# Altium PCB PCB1.PcbDoc
Units mm, origin at the board's own origin, x right, y up, seen from the top; angles counter-clockwise.
Board outline 20 x 20 mm, 2 copper layers (Top Layer, Bottom Layer); 5 components, 4 nets, 10 pads, 1 vias.
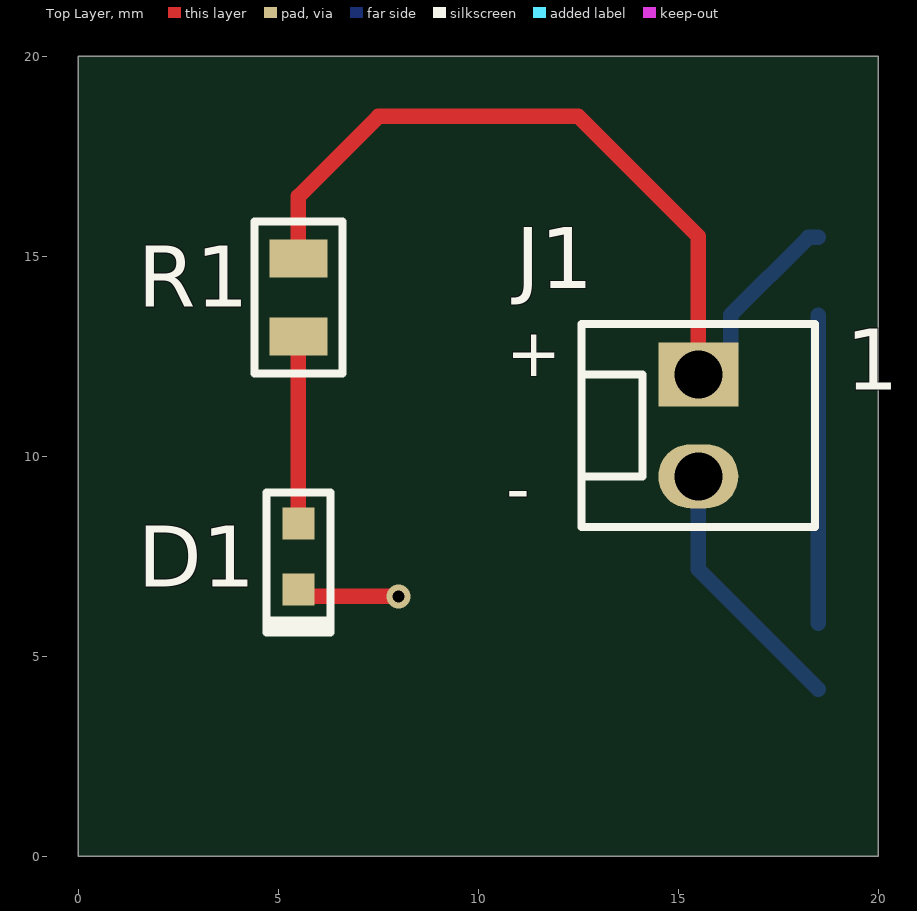
[diagram p0: Top Layer view]
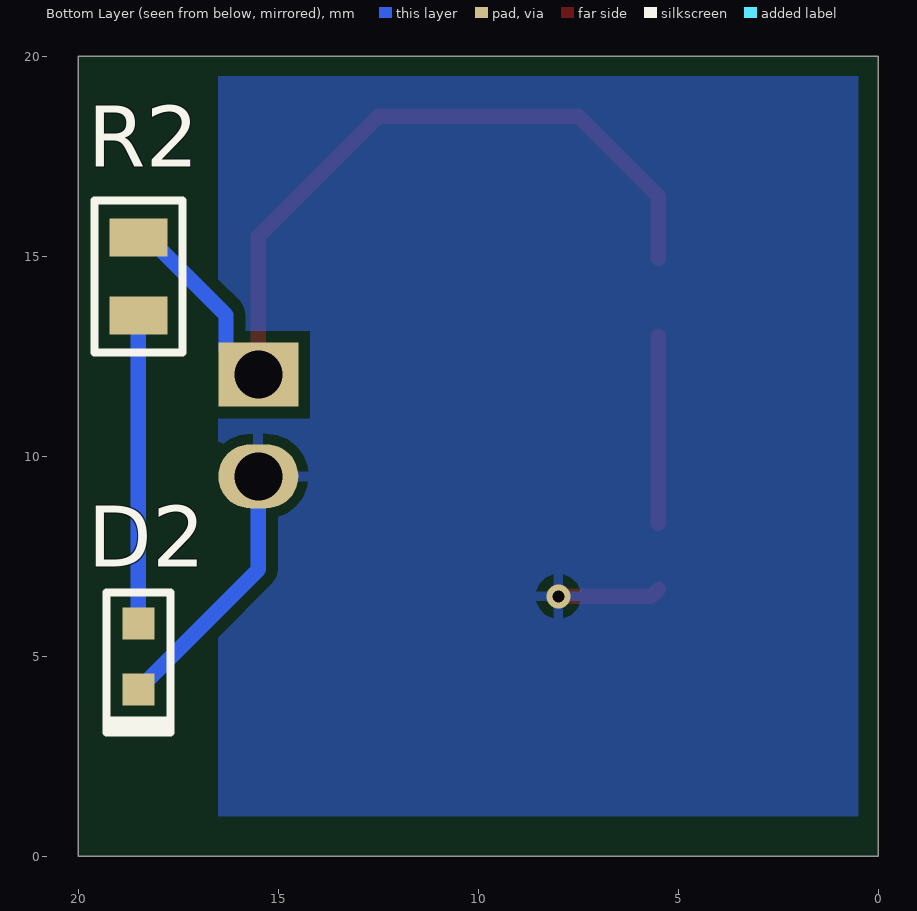
[diagram p1: Bottom Layer view, seen from below]
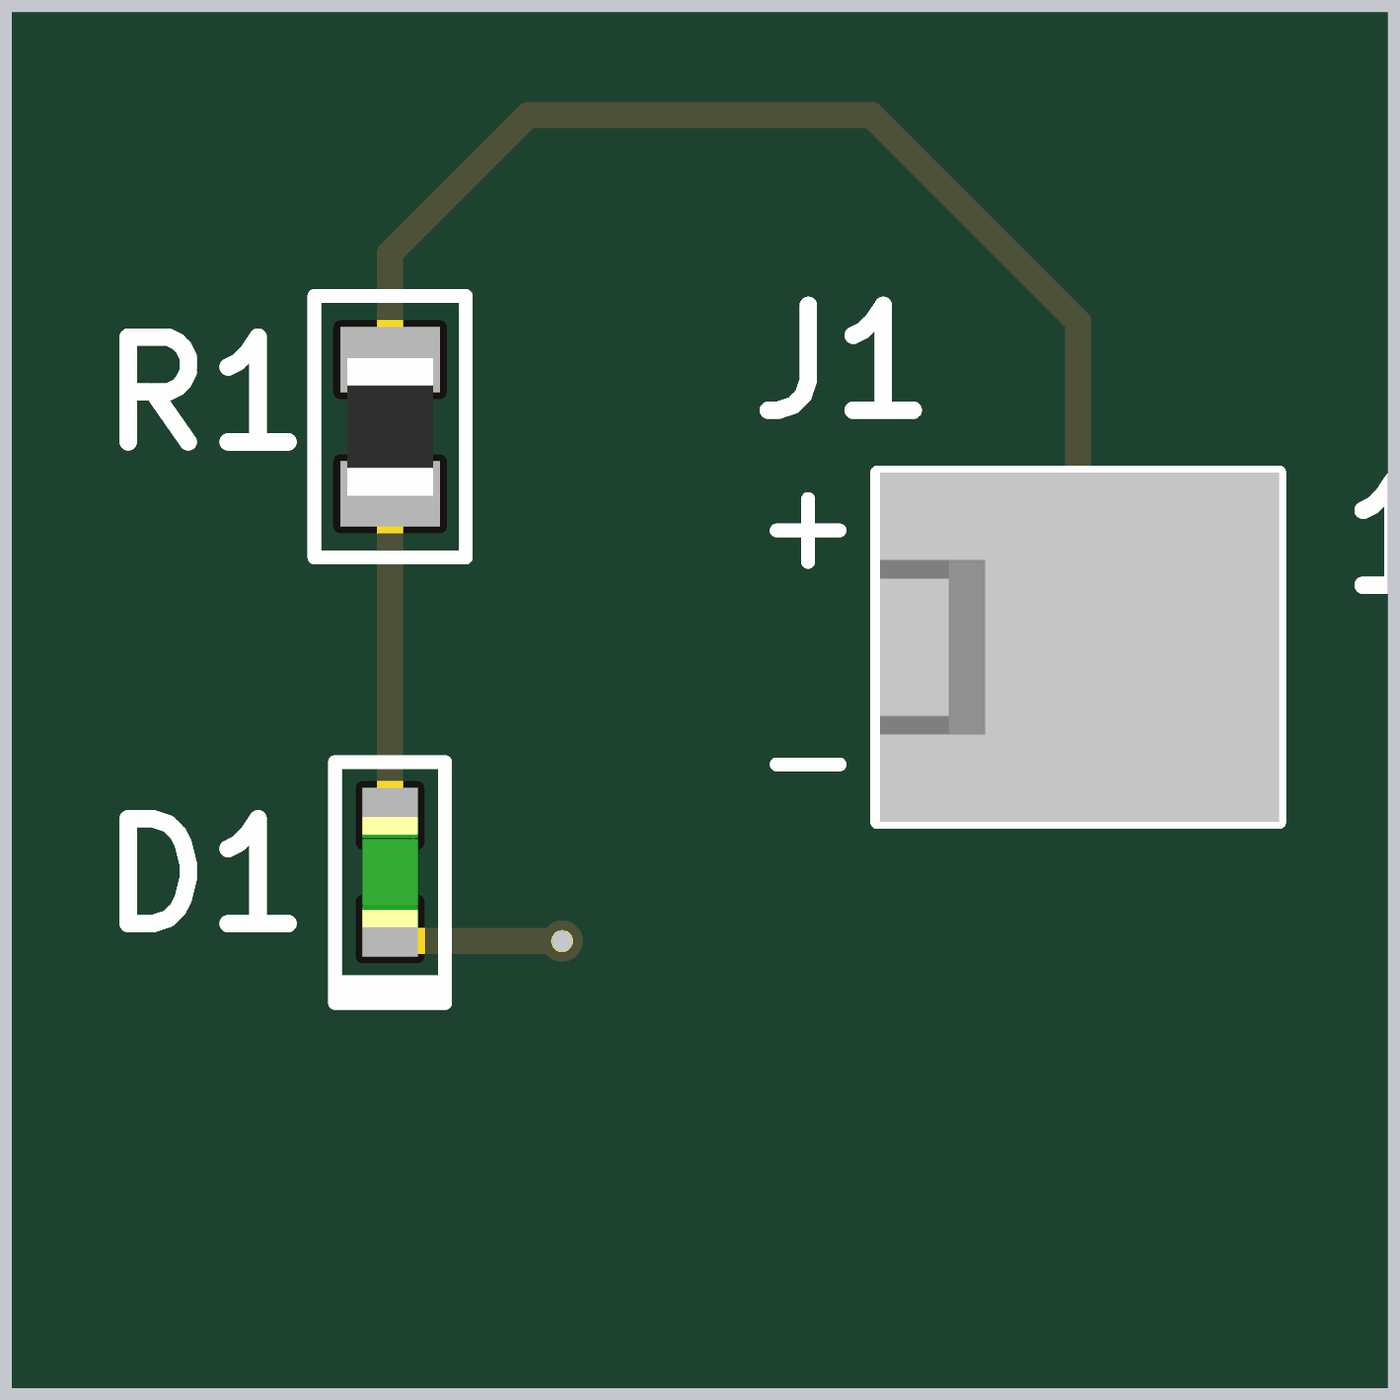
[diagram p2: 3D render of the assembled board from above, using the file's embedded part models]

## Layer stack, top to bottom
Top Solder: solder mask 0.0102, Solder Resist, Dk 3.5
Top Layer: signal copper 0.0356
Dielectric 1: dielectric 0.32, FR-4, Dk 4.8
Bottom Layer: signal copper 0.0356
Bottom Solder: solder mask 0.0102, Solder Resist, Dk 3.5

## Board outline
0,20 20,20 20,0 0,0

## Design rules (kind name [scope] priority, off if disabled: settings)
Clearance [All] p1: gap=0.3 ignorepadtopadclearanceinfootprint=FALSE
PolygonConnect [All] p1: connectstyle=Relief reliefconductorwidth=0.254 reliefentries=4 polygonreliefangle="90 Angle" airgapwidth=0.254
RoutingVias [All] p1: holewidth=0.3 width=6 viastyle="Through Hole" minholewidth=0.3 minwidth=0.6 maxholewidth=0.3 maxwidth=0.6
SolderMaskExpansion [All] p1: expansion=0.102 istentingtop=FALSE
Width [All] p1: maxlimit=1 minlimit=0.3 preferedwidth=0.5
30 further rules are at their usual default settings.

## Components (designator, comment, footprint, x,y, rotation, side; value= is the part's Value field where it differs from the comment)
D1 "LED" LED0603G 5.5,7.5 r90 top
D2 "LED" LED0603G 18.5,5 r90 bottom
J1 "1X2 Header" HDR1X2 15.5,12.04 r0 top
R1 "360R" R0805 5.5,13.975 r90 top
R2 "360R" R0805 18.5,14.5 r90 bottom

## Footprints (in the part's own frame and the unit in brackets; to place one, negate y for a bottom-side part, rotate by r counter-clockwise, add the part's x,y. Pads: shape width x height; smd on the part's side, far side on the other; paste and mask are expansions set on the pad)
HDR1X2 [mm]
  rect 2x1.6 hole 1.2: 1(0,0)
  oval 2x1.6 hole 1.2: 2(0,-2.54)
  silkscreen extent -2.92,-3.81 2.92,1.27, body extent -2.88,-3.81 2.92,1.27, height 11.71
LED0603G [mm]
  rect 0.8x0.8 smd: 1(-0.825,0) 2(0.825,0)
  silkscreen extent -1.9,-0.8 1.6,0.9, body extent -0.8,-0.4 0.8,0.4, height 0.4
R0805 [mm]
  rect 0.95x1.45 smd: 1(-0.975,0) 2(0.975,0)
  silkscreen extent -1.9,-1.1 1.9,1.1, body extent -1,-0.62 1,0.62, height 0.61

## Part data
D1 D2: library part LNJ826W83RA, "SC, VISIBLE LED SMD-Thin USS,InGaAlP,Hi Brt Orange", Case Code (Metric)=1608, Case Code (Imperial)=0603, Color=Orange, Forward Current=5mA, Forward Voltage=1.9V, Manufacturer 1=Panasonic, Max Operating Temperature=85°C, Min Operating Temperature=-30°C, Package Quantity=1, Supplier Part Number 1=P13487CT-ND, Case/Package=0603, Category=LEDs, ComponentLink1Description=https://datasheet.ciiva.com/4688/lnj826w83ra-cek-225979-4688595.pdf?src-supplier=Mouser, ComponentLink1URL=https://datasheet.ciiva.com/4688/lnj826w83ra-cek-225979-4688595.pdf?src-supplier=Mouser, ComponentLink2Description=https://datasheet.ciiva.com/9326/lnj826w83ra-cek-9326754.pdf?src-supplier=Avnet, ComponentLink2URL=https://datasheet.ciiva.com/9326/lnj826w83ra-cek-9326754.pdf?src-supplier=Avnet, ComponentLink3Description=https://datasheet.ciiva.com/11775/0900766b80f0a8c4-11775398.pdf?src-supplier=RSComponents, ComponentLink3URL=https://datasheet.ciiva.com/11775/0900766b80f0a8c4-11775398.pdf?src-supplier=RSComponents, ComponentLink4Description=https://datasheet.ciiva.com/5685/340520-5685541.pdf?src-supplier=Farnell, ComponentLink4URL=https://datasheet.ciiva.com/5685/340520-5685541.pdf?src-supplier=Farnell, ComponentLink5Description=https://datasheet.ciiva.com/5685/340520-5685543.pdf?src-supplier=Farnell, ComponentLink5URL=https://datasheet.ciiva.com/5685/340520-5685543.pdf?src-supplier=Farnell, Dominant Wavelength=620nm, Height=0.43mm, Lead Free="Lead Free", Length=1.6mm, Lens Style=Rectangular, Luminous Intensity=19mcd, Manufacturer Part Number 1=LNJ826W83RA, Mount="Surface Mount", Number of LEDs=1, Number of Pins=2, Packaging="Tape and Reel", Pricing 1="1=0,33000, 10=0,21700, 100=0,15580, 500=0,13068, 1000=0,12276 (USD)", Radiation Hardening=No, REACH SVHC=Yes, RoHS=Yes, RoHS Compliant=Yes, Series=LN, Stock 1=10247, Supplier 1=Digi-Key, Test Current=5mA, Wavelength=627nm, Width=0.8mm, Illumination Color=Orange
J1: library part 22-29-2021, "CONN HEADER VERT 2POS 2.54MM", Color=White, Flammability Rating="UL94 V-0", Housing Color=Natural, Manufacturer 1=Molex, Max Operating Temperature=80°C, Package Quantity=24000, Supplier Part Number 1=WM2744-ND, Voltage Rating (DC)=250V, Category="Headers and Wire Housings", ComponentLink1Description=https://datasheet.ciiva.com/70131/022292021-sd-70131706.pdf?src-supplier=Digi-Key, ComponentLink1URL=https://datasheet.ciiva.com/70131/022292021-sd-70131706.pdf?src-supplier=Digi-Key, Connector Type="Header,Male Pin", Contact Material=Tin, Contact Mating Length=0.295inch, Contact Plating=Gold, Contact Post Length=0.14inch, Contact Shape=Square, Contact Type=-, Fastening Type=Friction, Gender=Male, Glow Wire Compliant=Non-compliant, Halogen Free="Low Halogen", Lead Free="Lead Free", Manufacturer Part Number 1=22-29-2021, Mount="Through Hole", Number of Positions=2, Number of Rows=1, Packaging=Bulk, Pricing 1="1=0,48000, 10=0,40400, 100=0,31400, 1000=0,24671, 5000=0,21680, 10000=0,20185 (USD)", RoHS=Yes, Series=6410, Stock 1=16163, Supplier 1=Digi-Key, Termination="Through Hole", Insulation Color=Natural, Insulation Height=0.461inch, Insulation Material=Nylon
R1 R2: library part CRCW0805360RFKEAHP, "RES SMD 360 OHM 1% 1/2W 0805", Case/Package=0805, Manufacturer 1="Vishay Dale", Max Operating Temperature=155°C, Max Power Dissipation=500mW, Min Operating Temperature=-55°C, Package Quantity=5000, Resistor Type="Thick Film", Supplier Part Number 1=CRCW0805360RFKEAHP-ND, Temperature Coefficient=100ppm/°C, Tolerance=1%, Category="Chip SMD Resistors", ComponentLink1Description=https://datasheet.ciiva.com/2581/crcwhpe3-2581493.pdf?src-supplier=Digi-Key, ComponentLink1URL=https://datasheet.ciiva.com/2581/crcwhpe3-2581493.pdf?src-supplier=Digi-Key, ComponentLink2Description=https://datasheet.ciiva.com/8898/crcwhpe3-8898911.pdf?src-supplier=Avnet, ComponentLink2URL=https://datasheet.ciiva.com/8898/crcwhpe3-8898911.pdf?src-supplier=Avnet, Contact Plating=Tin, Features="Automotive AEC-Q200", Height=0.024inch, Lead Free="Lead Free", Length=0.079inch, Manufacturer Part Number 1=CRCW0805360RFKEAHP, Number of Terminations=2, Packaging="Tape and Reel", Pricing 1="5000=0,03019, 10000=0,02818 (USD)", Radiation Hardening=No, Resistance=360R, RoHS=Yes, RoHS Compliant=Yes, Series=CRCW-HP, Stock 1=5000, Supplier 1=Digi-Key, Width=0.049inch

## Via types
v1: diameter 0.6, hole 0.3, Top Layer to Bottom Layer, tented both sides, 1 vias

## Nets (pads, with @x,y where several pads share a name; then routed paths per layer and width w, separated by ;. In a path a pad name is that pad's centre, name@x,y a point inside that pad or via, vN(x,y) a via of type N, cw(c..) or ccw(c..) an arc to the next point about the centre after c; other vN are vias at no path point)
+3V3: J1.1 R1.2 R2.2 | length 22
  Top Layer w0.381: R1.2 5.5,16.5 7.5,18.5 12.5,18.5 15.5,15.5 J1.1
  Bottom Layer w0.381: J1.1 15.7,12.04 16.31,12.649 16.31,13.534 18.25,15.475 R2.2
DIODE1: D1.2 R1.1 | length 4.7
  Top Layer w0.381: D1.2 R1.1
DIODE2: D2.2 R2.1 | length 7.7
  Bottom Layer w0.381: D2.2 R2.1
GND: D1.1 D2.1 J1.2 | length 9.3
  Top Layer w0.381: D1.1 5.675,6.5 v1(8,6.5) ; J1.2@15.3,9.5 J1.2
  Bottom Layer w0.381: J1.2 15.5,7.175 D2.1

## Polygon pours and split planes (outlines as drawn)
GND on Bottom Layer "GND_L02_P000" (solid, pour order 0): 0.5,1 16.5,1 16.5,19.5 0.5,19.5

## Silkscreen, mask and mechanical layers (free items; w line width, h text height)
Top Overlay:
  text "+" at 10.7,12 h1.2
  text "-" at 10.7,8.6 h1.2
Board Outline:
  the board outline again, w0.1

## Text inside footprints (layer, text, board x,y; h text height)
J1: Top Overlay "1" at 19.183,11.659 h1.52